# Altium PCB 5111HB015.pcbdoc (part 2 of 2)
Units mm, origin at the board's own origin, x right, y up, seen from the top; angles counter-clockwise.
Board outline 127.27 x 126.7 mm, 2 copper layers (Top Layer, Top, Bottom Layer, Bottom); 107 components, 65 nets, 610 pads, 396 vias.
Unrouted connection lines stored in the file: 97.
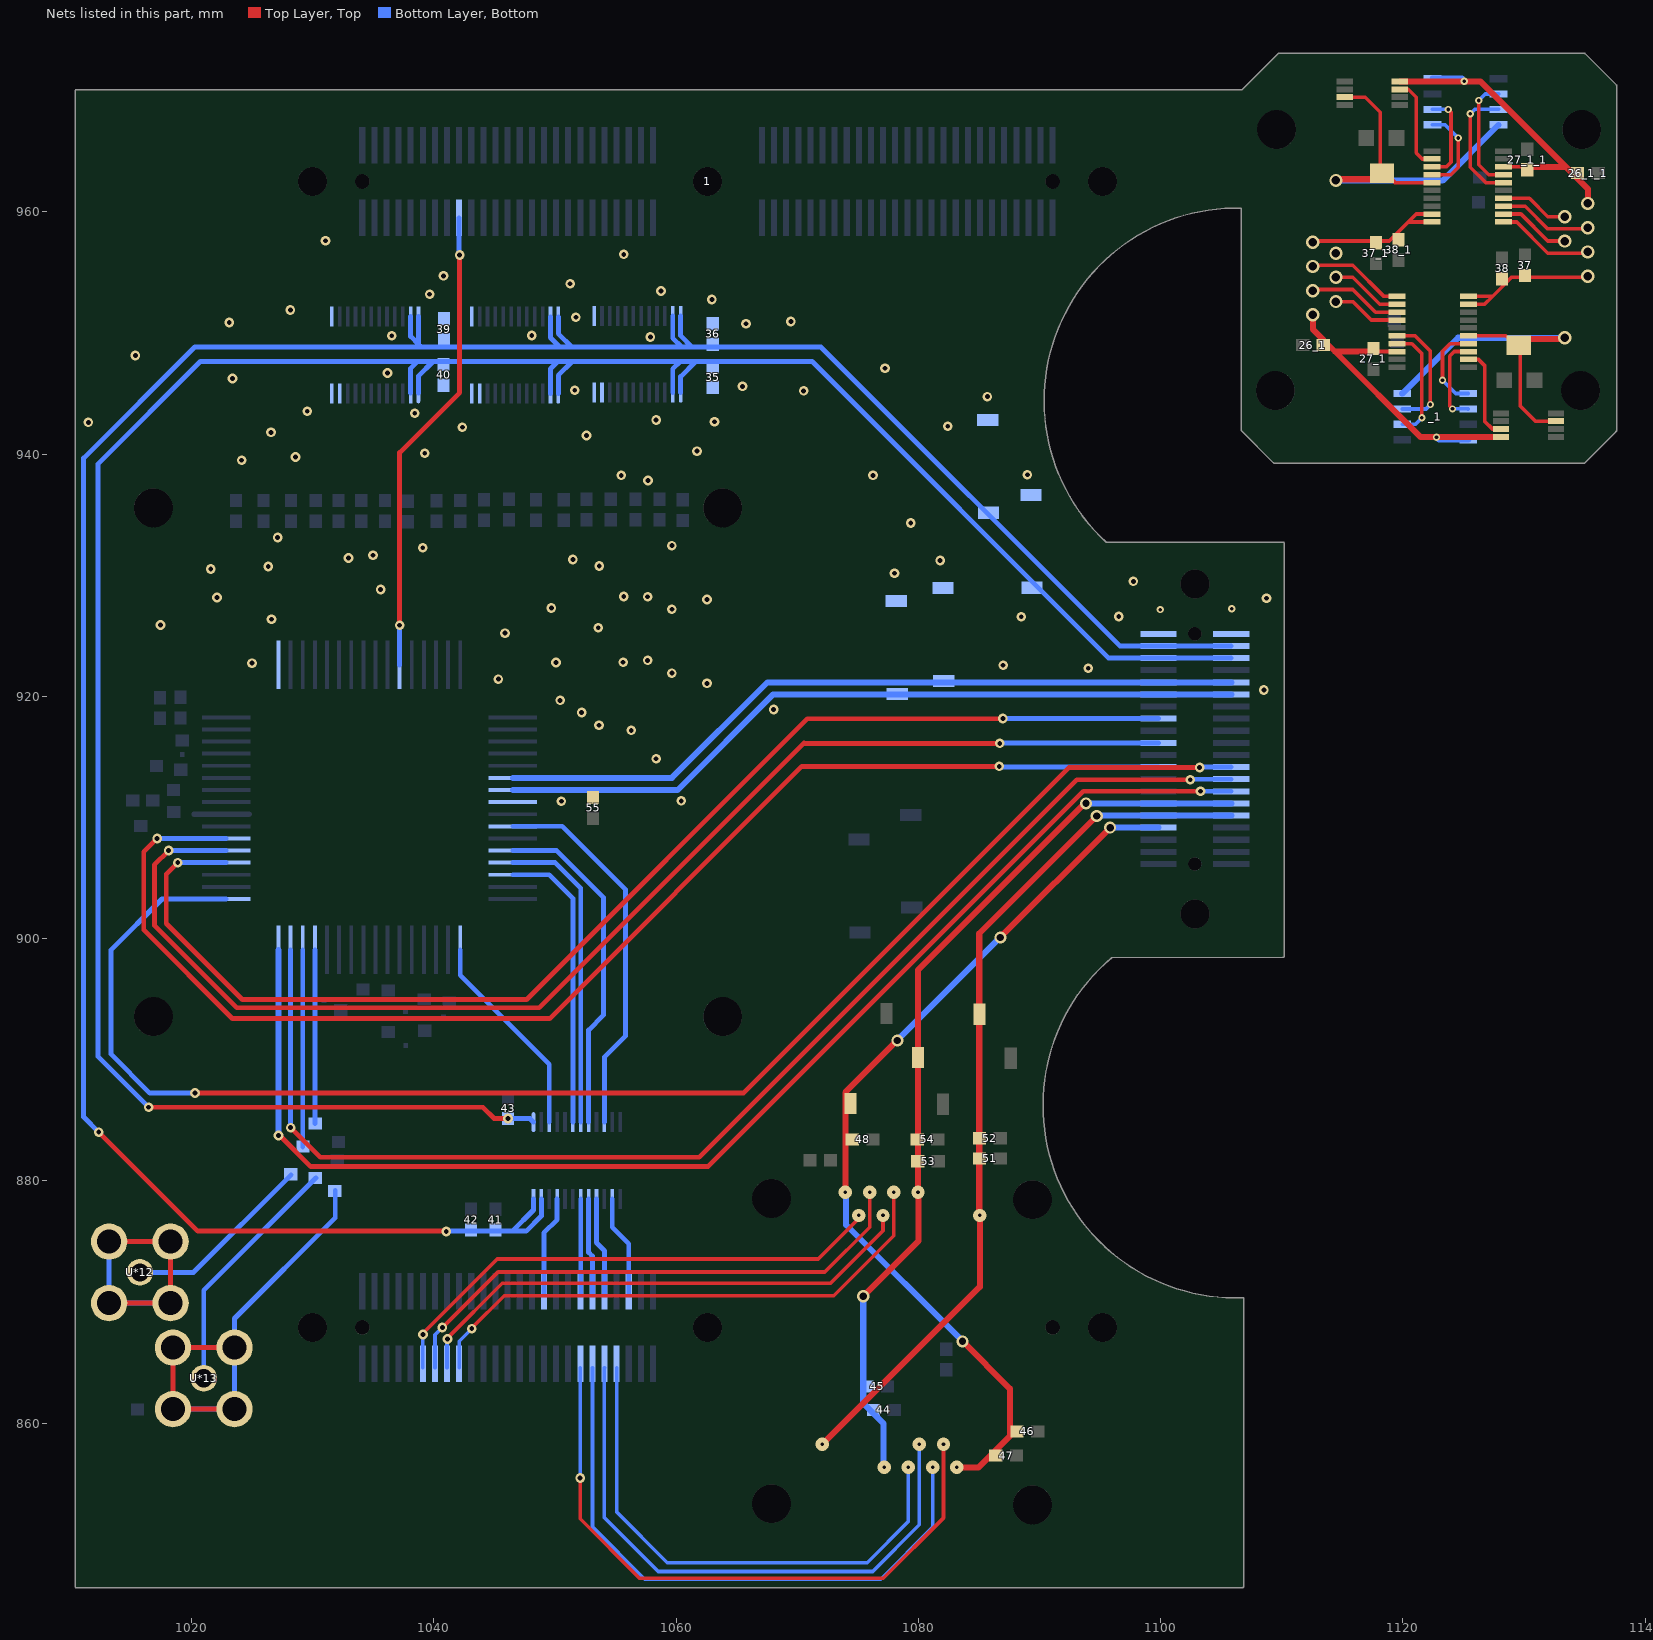
[diagram p2: the nets of this part, all layers, seen from the top]

## Via types
v1: diameter 0.8, hole 0.4, Top Layer, Top to Bottom Layer, Bottom, tented both sides, 300 vias
v2: diameter 1.1, hole 0.3, Top Layer, Top to Bottom Layer, Bottom, 30 vias
v3: diameter 1.1, hole 0.7, Top Layer, Top to Bottom Layer, Bottom, 30 vias
v4: diameter 0.6, hole 0.3, Top Layer, Top to Bottom Layer, Bottom, tented both sides, 14 vias
v5: diameter 1.2, hole 0.6, Top Layer, Top to Bottom Layer, Bottom, tented both sides, 9 vias
v6: diameter 1, hole 0.6, Top Layer, Top to Bottom Layer, Bottom, tented both sides, 7 vias
v7: diameter 0.9, hole 0.5, Top Layer, Top to Bottom Layer, Bottom, tented both sides, 6 vias

## Nets (pads, with @x,y where several pads share a name; then routed paths per layer and width w, separated by ;. In a path a pad name is that pad's centre, name@x,y a point inside that pad or via, vN(x,y) a via of type N, cw(c..) or ccw(c..) an arc to the next point about the centre after c; other vN are vias at no path point) (continued)
DAC_SCLK: ?.13@1119.525,951.725 ?.13@1128.325,960.475 ?.81 ?.94 | length 109.9
  Top Layer, Top w0.3: v1@1040.712,867.887 1045.3,872.475 1072.275,872.475 1075.975,876.175 v2(1075.975,879.05) ; v3@1112.775,953.6 1115.875,953.6 1117.75,951.725 ?.13@1119.525,951.725 ; ?.13@1128.325,960.475 1130.1,960.475 1131.975,958.6 v3@1135.075,958.6
  Bottom Layer, Bottom w0.3: ?.94@1040.087,864.573 ?.94@1040.087,864.898 1040.087,867.287 v1(1040.7,867.9) ; ?.81@1053.087,864.573 1053.1,864.56 1053.1,851.425 1057.405,847.12 1076.895,847.12 ; 1076.9,847.12 1076.895,847.12 ; v2(1081.175,856.35) 1081.175,851.4 1076.895,847.12
  other v3: 1112.575,953.5 1135.275,958.7
DAC_SDIN: ?.12@1119.525,952.375 ?.12@1128.325,959.825 ?.80 ?.93 | length 103.8
  Top Layer, Top w0.3: v1@1041.05,866.95 1045.65,871.55 1072.75,871.55 1077.075,875.875 v2(1077.075,877.15) ; v3(1114.475,954.6) 1115.875,954.6 1118.1,952.375 ?.12@1119.525,952.375 ; ?.12@1128.325,959.825 1129.75,959.825 1131.975,957.6 v3(1133.375,957.6)
  Bottom Layer, Bottom w0.3: ?.93@1041.087,864.573 ?.93@1041.087,864.898 1041.087,866.912 v1(1041.125,866.95) ; ?.80@1054.087,864.573 1054.075,864.561 1054.075,852.2 1058.525,847.75 1076.225,847.75 1080.075,851.6 v2(1080.075,858.25)
DAC_SDO: ?.11@1119.525,953.025 ?.11@1128.325,959.175 ?.79 ?.92 | length 104.3
  Top Layer, Top w0.3: v1@1043.1,867.825 1045.8,870.525 1073.025,870.525 1077.975,875.475 v2(1077.975,879.05) ; v3@1112.875,955.6 1115.875,955.6 1118.45,953.025 ?.11@1119.525,953.025 ; ?.11@1128.325,959.175 1129.4,959.175 1131.975,956.6 v3@1134.975,956.6
  Bottom Layer, Bottom w0.3: ?.92@1042.087,864.573 ?.92@1042.087,864.898 1042.087,866.762 v1(1043.125,867.8) ; ?.79@1055.087,864.573 1055.087,852.663 1059.275,848.475 1075.775,848.475 1079.175,851.875 v2(1079.175,856.35)
  other v3: 1112.575,955.5 1135.275,956.7
DAC_SYNC: ?.14@1119.525,951.075 ?.14@1128.325,961.125 ?.82 ?.95 | length 107
  Top Layer, Top w0.3: v1(1039.1,867.325) 1039.1,867.425 1045.225,873.55 1071.725,873.55 1075.075,876.9 v2(1075.075,877.15) ; v1(1052.075,855.475) 1052.075,852.1 1056.975,847.2 1077.1,847.2 1082.075,852.175 v2(1082.075,858.25) ; v3(1114.475,952.6) 1115.875,952.6 1117.4,951.075 ?.14@1119.525,951.075 ; ?.14@1128.325,961.125 1130.45,961.125 1131.975,959.6 v3(1133.375,959.6)
  Bottom Layer, Bottom w0.3: ?.95@1039.087,864.573 ?.95@1039.087,864.898 1039.087,867.312 v1(1039.1,867.325) ; v1(1052.075,855.475) 1052.087,855.487 ?.82@1052.087,864.573
DAC_VCC: 37.2 37_1.2 38.2 38_1.2 44.2 45.2 53.2 54.2 ?.2@1079.96,890.2 ?.6@1099.831,911.167 ?.9@1122.425,959.825 ?.9@1125.425,952.375 ?.10@1122.425,959.175 ?.10@1125.425,953.025 ?.35@1105.831,911.167 | length 100.9
  Top Layer, Top w0.3: v3@1112.675,957.6 1118.875,957.6 1120.475,959.2 ; ?.10@1122.425,959.175 1120.5,959.175 1120.475,959.2 ; ?.9@1122.425,959.825 1121.1,959.825 1120.475,959.2 ; ?.9@1125.425,952.375 1126.75,952.375 1127.375,953 ; ?.10@1125.425,953.025 1127.35,953.025 1127.375,953 ; v3@1135.175,954.6 1128.975,954.6 1127.375,953
  Top Layer, Top w0.5: v6@1075.563,870.363 1075.563,870.588 1080.025,875.05 1080.025,879 v2(1079.975,879.05) 1079.975,897.425 1093.725,911.175 v6(1093.85,911.175)
  Bottom Layer, Bottom w0.5: v6(1075.45,870.475) 1075.45,861.625 1077.125,859.95 1077.125,856.4 v2(1077.175,856.35) v2@1077,856.175 ; v6@1093.775,911.167 ?.6@1099.831,911.167 ?.35@1105.831,911.167
  other v3: 1135.275,954.7 1112.575,957.5
DAC_VDD: 51.2 52.2 ?.1@1085.05,893.754 ?.1@1118.275,963.2 ?.1@1129.575,949 ?.5@1099.831,910.167 ?.5@1122.425,962.425 ?.5@1125.425,949.775 ?.7@1115.2,969.475 ?.7@1132.65,942.725 ?.8@1127.9,967.195 ?.36@1105.831,910.167 _1.8 | length 134.9
  Top Layer, Top w0.3: ?.7@1115.2,969.475 1116.9,969.475 1118.145,968.23 ?.1@1118.145,963.33 ; ?.1@1118.575,963.2 1119.35,962.425 ?.5@1122.425,962.425 ; ?.5@1125.425,949.775 1128.5,949.775 ?.1@1129.275,949 ; ?.1@1129.705,948.87 1129.705,943.97 1130.95,942.725 ?.7@1132.65,942.725
  Top Layer, Top w0.5: v2(1072.075,858.25) 1085.075,871.25 v2(1085.075,877.15) 1085.025,877.2 1085.025,893.754 1085.025,900.425 v6(1094.725,910.125) ; v3@1114.475,962.7 ?.1@1117.775,962.7 ; ?.1@1130.075,949.5 v3@1133.375,949.5
  Bottom Layer, Bottom w0.5: v6@1094.6,910.167 ?.5@1099.831,910.167 ?.36@1105.831,910.167 ; v3(1114.475,962.6) 1122.75,962.6 ; _1.8@1119.95,945.005 1124.559,949.614 1125.1,949.614 ; 1122.75,962.586 1123.291,962.586 ?.8@1127.9,967.195 ; 1125.1,949.6 v3(1133.375,949.6)
DAC_VOUT: ?.2@1122.425,964.375 ?.2@1125.425,947.825 ?.3@1119.75,970.125 ?.3@1128.1,942.075 | length 15.5
  Top Layer, Top w0.3: ?.3@1119.75,970.125 1120.45,970.125 1121.1,969.475 1121.1,964.875 1121.6,964.375 ?.2@1122.425,964.375 ; ?.2@1125.425,947.825 1126.25,947.825 1126.75,947.325 1126.75,942.725 1127.4,942.075 ?.3@1128.1,942.075
DAC_VREFNF: ?.7@1127.9,968.465 ?.16@1119.525,949.775 ?.16@1128.325,962.425 _1.7 | length 20.3
  Top Layer, Top w0.3: ?.16@1119.525,949.775 1121,949.775 1122.275,948.5 v4(1122.275,944.1) ; v4(1125.575,968.1) 1125.575,963.7 1126.85,962.425 ?.16@1128.325,962.425
  Bottom Layer, Bottom w0.3: _1.7@1119.95,943.735 1121.91,943.735 v4(1122.275,944.1) ; v4(1125.575,968.1) 1125.94,968.465 ?.7@1127.9,968.465
DAC_VREFNS: ?.6@1127.9,969.735 ?.17@1119.525,949.125 ?.17@1128.325,963.075 _1.6 | length 19.1
  Top Layer, Top w0.3: ?.17@1119.525,949.125 1120.75,949.125 1121.575,948.3 v4(1121.575,943) ; v4(1126.275,969.2) 1126.275,963.9 1127.1,963.075 ?.17@1128.325,963.075
  Bottom Layer, Bottom w0.3: _1.6@1119.95,942.465 1121.04,942.465 v4(1121.575,943) ; v4(1126.275,969.2) 1126.81,969.735 ?.6@1127.9,969.735
DAC_VREFPF: ?.1@1122.45,967.195 ?.4@1122.425,963.075 ?.4@1125.425,949.125 _1.1 | length 14.8
  Top Layer, Top w0.3: ?.4@1122.425,963.075 1123.95,963.075 1124.575,963.7 v4(1124.575,966.1) ; v4(1123.275,946.1) 1123.275,948.5 1123.9,949.125 ?.4@1125.425,949.125
  Bottom Layer, Bottom w0.3: ?.1@1122.45,967.195 1123.48,967.195 v4(1124.575,966.1) ; v4(1123.275,946.1) 1124.37,945.005 _1.1@1125.4,945.005
DAC_VREPS: ?.2@1122.45,968.465 ?.3@1122.425,963.725 ?.3@1125.425,948.475 _1.2 | length 14.9
  Top Layer, Top w0.3: ?.3@1122.425,963.725 1123.6,963.725 1123.975,964.1 1123.975,968.236 v4(1123.75,968.461) ; v4(1124.1,943.739) 1123.875,943.964 1123.875,948.1 1124.25,948.475 ?.3@1125.425,948.475
  Bottom Layer, Bottom w0.3: ?.2@1122.45,968.465 1123.724,968.461 v4(1123.75,968.461) ; v4(1124.1,943.739) 1125.374,943.735 _1.2@1125.4,943.735
DAC_VSS: 26_1.1 26_1_1.1 27_1.1 27_1_1.1 46.1 47.1 48.1 ?.2@1074.385,886.4 ?.4@1099.831,909.167 ?.4@1119.75,970.775 ?.4@1122.45,971.005 ?.4@1128.1,941.425 ?.18@1119.525,948.475 ?.18@1128.325,963.725 _1.4 | length 130.8
  Top Layer, Top w0.3: 27_1.1@1117.775,948.475 ?.18@1119.525,948.475 ; ?.18@1128.325,963.725 27_1_1.1@1130.075,963.725
  Top Layer, Top w0.5: v2(1073.975,879.05) 1073.975,887.309 v6(1078.266,891.6) ; v2(1083.175,856.35) 1084.975,856.35 1087.55,858.925 1087.55,862.85 v6(1083.65,866.75) ; v6(1086.771,900.105) v6(1095.833,909.167) ; v3(1112.575,951.5) 1112.575,950.3 1114.4,948.475 ; 27_1.1@1117.775,948.475 1114.4,948.475 ; ?.4@1119.75,970.775 1126.4,970.775 1133.45,963.725 ; ?.4@1128.1,941.425 1121.45,941.425 1114.4,948.475 ; 27_1_1.1@1130.075,963.725 1133.45,963.725 ; v3(1135.275,960.7) 1135.275,961.9 1133.45,963.725
  Bottom Layer, Bottom w0.3: v4(1122.775,941.4) v4@1122.98,941.195 ; v4@1124.87,971.005 v4(1125.075,970.8)
  Bottom Layer, Bottom w0.5: v2(1073.975,879.05) 1074.025,879 1074.025,876.375 v6(1083.65,866.75) ; v6(1078.266,891.6) v6(1086.771,900.105) ; v6(1095.833,909.167) ?.4@1099.831,909.167 ; ?.4@1122.45,971.005 v4@1124.87,971.005 ; v4@1122.98,941.195 _1.4@1125.4,941.195
DGND: 35.1 36.2 39.2 40.1 55.2 ?.1@1078.175,927.875 ?.1@1082.025,928.95 ?.1@1085.723,942.825 ?.2@1089.3,936.64 ?.11@1032.225,945.025 ?.11@1043.775,945 ?.11@1053.875,945.075 ?.12@1031.575,945.025 ?.12@1043.125,945 ?.12@1053.225,945.075 ?.13@1031.575,951.375 ?.13@1043.125,951.35 ?.13@1053.225,951.425 ?.20@1099.831,925.167 ?.21@1105.831,925.167 ?.33@1046.525,911.275 ?.56
  other v1: 1050.525,911.35 1060.425,911.375 1058.35,914.85 1056.3,917.2 1053.625,917.625 1052.2,918.675 1068.05,918.925 1050.425,919.675 1108.525,920.525 1062.55,921.075 1045.325,921.425 1059.65,921.925 1094.025,922.325 1087,922.575 1024.975,922.75 1050.075,922.8 1055.625,922.825 1057.65,922.975 1045.875,925.225 1053.575,925.675 1017.425,925.9 1026.6,926.375 1088.5,926.575 1096.55,926.6 1059.65,927.2 1049.7,927.3 1062.55,928 1108.75,928.1 1022.1,928.175 1057.65,928.225 1055.675,928.25 1035.6,928.825 1097.75,929.5 1078.025,930.175 1021.575,930.525 1026.325,930.725 1053.65,930.775 1081.8,931.225 1051.475,931.3 1032.95,931.425 1034.975,931.65 1039.075,932.275 1059.65,932.45 1027.1,933.125 1079.375,934.325 1057.675,937.825 1055.475,938.25 1076.25,938.25 1089,938.3 1024.125,939.5 1028.575,939.775 1039.25,940.075 1061.725,940.25 1052.6,941.55 1026.55,941.8 1042.35,942.225 1082.425,942.3 1011.475,942.625 1063.175,942.675 1058.35,942.825 1038.425,943.375 1029.55,943.55 1085.7,944.75 1070.525,945.225 1051.625,945.275 1065.475,945.6 1023.375,946.25 1036.175,946.7 1077.25,947.1 1015.35,948.15 1057.875,949.675 1036.525,949.775 1048.075,949.8 1065.775,950.775 1023.1,950.875 1069.475,950.95 1051.725,951.3 1028.15,951.9 1062.95,952.775 1039.65,953.2 1058.75,953.475 1051.25,954.075 1040.8,954.725 1055.675,956.5 1031.05,957.625
  other v3: 1114.475,956.6
  other v4: 1099.98,927.167 1105.866,927.228
DLL_PG: 1.92 ?.46 | length 39
  Top Layer, Top w0.4: v1(1037.175,925.875) 1037.175,940.125 1042.125,945.075 v1(1042.125,956.45)
  Bottom Layer, Bottom w0.4: ?.46@1037.175,922.6 v1(1037.175,925.875) ; 1.92@1042.087,959.515 1042.087,956.488 v1(1042.125,956.45)
DVCC_2.5: ?.2@1082.1,921.285 ?.16@1099.831,921.167 ?.25@1105.831,921.167 ?.35@1046.525,913.275 | length 62.6
  Bottom Layer, Bottom w0.5: ?.35@1046.525,913.275 1059.65,913.275 1067.542,921.167 ?.16@1099.831,921.167 ?.25@1105.831,921.167
DVDD_1.2: ?.2@1078.25,920.21 ?.15@1099.831,920.167 ?.26@1105.831,920.167 ?.34@1046.525,912.275 | length 62.6
  Bottom Layer, Bottom w0.5: ?.34@1046.525,912.275 1060.125,912.275 1068.017,920.167 ?.15@1099.831,920.167 ?.26@1105.831,920.167
ENCAL: ?.7@1052.125,884.85 ?.17@1052.775,878.5 ?.20@1053.087,870.898 ?.28@1046.525,906.275 | length 33.9
  Bottom Layer, Bottom w0.4: ?.28@1046.525,906.275 1050.025,906.275 1052.125,904.175 ?.7@1052.125,884.85 ; ?.17@1052.775,878.5 1052.775,874.1 1053.087,873.788 ?.20@1053.087,870.898 ?.20@1053.087,870.573
ENCALG: ?.3@1049.525,884.85 ?.16@1049.087,870.898 ?.21@1050.175,878.5 ?.24@1042.175,899.075 | length 25.6
  Bottom Layer, Bottom w0.4: ?.24@1042.175,899.075 1042.175,896.975 1049.525,889.625 ?.3@1049.525,884.85 ; ?.16@1049.087,870.573 ?.16@1049.087,870.898 1049.087,875.712 1050.175,876.8 ?.21@1050.175,878.5
LATCHDEL: ?.6@1051.475,884.85 ?.18@1052.125,878.5 ?.19@1052.087,870.898 ?.27@1046.525,905.275 | length 32.2
  Bottom Layer, Bottom w0.4: ?.27@1046.525,905.275 1049.525,905.275 1051.475,903.325 ?.6@1051.475,884.85 ; ?.19@1052.087,870.573 1052.125,870.611 ?.18@1052.125,878.5
NENCMS: ?.8@1052.775,884.85 ?.16@1053.425,878.5 ?.21@1054.087,870.898 ?.29@1046.525,907.275 | length 36.4
  Bottom Layer, Bottom w0.4: ?.29@1046.525,907.275 1050.15,907.275 1054,903.425 1054,893.675 1052.775,892.45 ?.8@1052.775,884.85 ; ?.16@1053.425,878.5 1053.425,874.9 1054.087,874.238 ?.21@1054.087,870.898 ?.21@1054.087,870.573
RESET: ?.10@1054.075,884.85 ?.14@1054.725,878.5 ?.23@1056.087,870.898 ?.31@1046.525,909.275 | length 39.9
  Bottom Layer, Bottom w0.4: ?.31@1046.525,909.275 1050.6,909.275 1055.825,904.05 1055.825,891.975 1054.075,890.225 ?.10@1054.075,884.85 ; ?.14@1054.725,878.5 1054.725,876.175 1056.087,874.813 ?.23@1056.087,870.898 ?.23@1056.087,870.573
VCC_BUF_2.5V: 35.2 40.2 43.1 ?.1@1038.725,945.025 ?.1@1048.225,884.85 ?.1@1050.275,945 ?.1@1060.375,945.075 ?.1@1089.375,928.975 ?.2@1038.075,945.025 ?.2@1049.625,945 ?.2@1059.725,945.075 ?.18@1099.831,923.167 ?.23@1105.831,923.167 | length 212.3
  Top Layer, Top w0.4: v1(1016.45,886.075) 1044.05,886.075 1044.975,885.15 v1(1046.125,885.15)
  Bottom Layer, Bottom w0.4: v1(1016.45,886.075) 1012.275,890.25 1012.275,939.2 1020.725,947.65 1038.625,947.65 ; ?.2@1038.075,945.025 1038.075,947.1 1038.625,947.65 ; ?.1@1038.725,945.025 1038.725,946.45 1039.925,947.65 ; v1(1046.125,885.15) 1047.925,885.15 ?.1@1048.225,884.85 ; ?.2@1049.625,945 1049.625,947.05 1050.225,947.65 ; ?.1@1050.275,945 1050.275,946.5 1051.425,947.65 ; ?.2@1059.725,945.075 1059.725,947.05 1060.325,947.65 ; ?.1@1060.375,945.075 1060.375,946.4 1061.625,947.65 ; ?.23@1105.831,923.167 ?.18@1099.831,923.167 1095.708,923.167 1071.225,947.65 1061.625,947.65 ; 1038.625,947.65 1039.925,947.65 ; 1039.925,947.65 1050.225,947.65 ; 1050.225,947.65 1051.425,947.65 ; 1051.425,947.65 1060.325,947.65 ; 1060.325,947.65 1061.625,947.65
VCC_BUF_3.3V: 36.1 39.1 41.1 42.1 ?.2@1085.798,935.16 ?.19@1099.831,924.167 ?.22@1105.831,924.167 ?.23@1038.075,951.375 ?.23@1048.875,878.5 ?.23@1049.625,951.35 ?.23@1059.725,951.425 ?.24@1038.725,951.375 ?.24@1048.225,878.5 ?.24@1050.275,951.35 ?.24@1060.375,951.425 | length 226.9
  Top Layer, Top w0.4: v1@1012.375,883.975 1020.5,875.85 v1@1041.025,875.85
  Bottom Layer, Bottom w0.4: v1(1012.325,884.025) 1011.075,885.275 1011.075,939.675 1020.25,948.85 1038.95,948.85 ; ?.23@1038.075,951.375 1038.075,949.725 1038.725,949.075 ; ?.24@1038.725,951.375 1038.725,949.075 ; v1(1041.025,875.825) 1041.05,875.85 1046.475,875.85 ; ?.24@1048.225,878.5 1048.225,877.6 1046.475,875.85 ; ?.23@1048.875,878.5 1048.875,877.1 1047.625,875.85 1046.475,875.85 ; ?.23@1049.625,951.35 1049.625,949.625 1050.4,948.85 ; ?.24@1050.275,951.35 1050.275,949.95 1051.375,948.85 ; ?.23@1059.725,951.425 1059.725,949.575 1060.45,948.85 ; ?.24@1060.375,951.425 1060.375,949.775 1061.3,948.85 ; ?.22@1105.831,924.167 ?.19@1099.831,924.167 1096.633,924.167 1071.95,948.85 1061.3,948.85 ; 1038.725,949.075 1038.95,948.85 ; 1038.95,948.85 1050.4,948.85 ; 1050.4,948.85 1051.375,948.85 ; 1051.375,948.85 1060.45,948.85 ; 1060.45,948.85 1061.3,948.85
VCMI: ?.10@1028.175,899.075 ?.33@1105.831,913.167 | length 106.3
  Top Layer, Top w0.4: v1@1028.187,884.387 1030.625,881.95 1061.9,881.95 1093.075,913.125 v1(1102.45,913.125)
  Bottom Layer, Bottom w0.4: v1(1028.175,884.4) ?.10@1028.175,899.075 ; v1(1102.45,913.125) 1102.492,913.167 ?.33@1105.831,913.167
VCMO: ?.3@1022.85,908.275 ?.9@1099.831,914.167 | length 109.2
  Top Layer, Top w0.4: v1(1017.15,908.275) 1016.05,907.175 1016.05,900.725 1023.375,893.4 1049.55,893.4 1070.375,914.225 v1(1086.675,914.225)
  Bottom Layer, Bottom w0.4: v1(1017.15,908.275) ?.3@1022.85,908.275 ; v1(1086.675,914.225) 1086.733,914.167 ?.9@1099.831,914.167
VIN: ?.1@1030.2,880.225 ?.1@1030.2,884.75 ?.1@1031.825,879.175 ?.12@1030.175,899.075 U*13.1 U*13.2 U*13.3 U*13.4 U*13.5 | length 76.6
  Top Layer, Top w0.4: U*13.3@1023.54,861.16 U*13.2@1018.46,861.16 U*13.5@1018.46,866.24 U*13.4@1023.54,866.24
  Bottom Layer, Bottom w0.4: U*13.2@1018.46,861.16 U*13.3@1023.54,861.16 U*13.4@1023.54,866.24 1023.54,868.64 1031.85,876.95 ?.1@1031.85,879.225 ; U*13.1@1021,863.7 1021,870.975 ?.1@1030.263,880.238 ; ?.1@1030.175,884.725 ?.12@1030.175,899.075
VIP: ?.1@1028.175,880.55 ?.1@1029.2,882.825 ?.11@1029.175,899.075 U*12.1 U*12.2 U*12.3 U*12.4 U*12.5 | length 62.6
  Top Layer, Top w0.4: U*12.2@1013.185,869.91 U*12.3@1018.265,869.91 U*12.4@1018.265,874.99 U*12.5@1013.185,874.99
  Bottom Layer, Bottom w0.4: U*12.1@1015.725,872.45 1020.15,872.45 ?.1@1028.212,880.512 ; U*12.3@1018.265,869.91 U*12.2@1013.185,869.91 U*12.5@1013.185,874.99 U*12.4@1018.265,874.99 ; ?.1@1029.175,882.8 ?.11@1029.175,899.075
VREFNI: ?.8@1022.85,903.275 ?.32@1105.831,914.167 | length 124.8
  Top Layer, Top w0.4: v1(1020.275,887.25) 1065.55,887.25 1092.425,914.125 v1(1103.225,914.125)
  Bottom Layer, Bottom w0.4: v1(1020.275,887.25) 1016.55,887.25 1013.35,890.45 1013.35,899.075 1017.55,903.275 ?.8@1022.85,903.275 ; v1(1103.225,914.125) 1103.267,914.167 ?.32@1105.831,914.167
VREFNO: ?.5@1022.85,906.275 ?.13@1099.831,918.167 | length 103.6
  Top Layer, Top w0.4: v1(1018.85,906.275) 1017.9,905.325 1017.9,901.25 1024.175,894.975 1047.65,894.975 1070.825,918.15 v1@1086.975,918.15
  Bottom Layer, Bottom w0.4: v1(1018.85,906.275) ?.5@1022.85,906.275 ; v1(1086.975,918.175) 1099.823,918.175 ?.13@1099.831,918.167
VREFPI: ?.9@1027.175,899.075 ?.34@1105.831,912.167 | length 107.7
  Top Layer, Top w0.4: v1@1027.338,883.688 1029.85,881.175 1062.625,881.175 1093.625,912.175 v1(1103.3,912.175)
  Bottom Layer, Bottom w0.4: v1(1103.3,912.175) 1103.308,912.167 ?.34@1105.831,912.167
  Bottom Layer, Bottom w0.5: v1(1027.175,883.75) ?.9@1027.175,899.075
VREFPO: ?.4@1022.85,907.275 ?.11@1099.831,916.167 | length 106.2
  Top Layer, Top w0.4: v1(1018.1,907.275) 1016.925,906.1 1016.925,901.1 1023.725,894.3 1048.7,894.3 1070.55,916.15 1070.575,916.125 v1(1086.725,916.125)
  Bottom Layer, Bottom w0.4: v1(1018.1,907.275) ?.4@1022.85,907.275 ; v1(1086.725,916.125) 1086.767,916.167 ?.11@1099.831,916.167
pads on no net: 1.1 1.2 1.3 1.4 1.5 1.6 1.7 1.8 1.9 1.10 1.11 1.12 1.13 1.14 1.15 1.16 1.17 1.18 1.19 1.20 1.21 1.22 1.23 1.24 1.25 1.26 1.27 1.28 1.29 1.30 1.31 1.32 1.33 1.34 1.35 1.36 1.37 1.38 1.39 1.40 1.41 1.42 1.43 1.44 1.45 1.46 1.47 1.48 1.49 1.50 1.51 1.52 1.53 1.54 1.55 1.56 1.57 1.58 1.59 1.60 1.61 1.62 1.63 1.64 1.65 1.66 1.67 1.68 1.69 1.70 1.71 1.72 1.73 1.74 1.75 1.76 1.77 1.78 1.79 1.80 1.101 1.102 1.103 1.104 1.105 ?.1@1034.087,870.898 ?.1@1122.425,965.025 ?.1@1125.425,947.175 ?.2@1035.087,870.898 ?.3@1036.087,870.898 ?.3@1059.075,945.075 ?.4@1037.087,870.898 ?.4@1058.425,945.075 ?.5@1038.087,870.898 ?.5@1057.775,945.075 ?.5@1115.2,970.775 ?.5@1132.65,941.425 ?.6@1039.087,870.898 ?.6@1057.125,945.075 ?.7@1040.087,870.898 ?.7@1056.475,945.075 ?.7@1099.831,912.167 ?.8@1041.087,870.898 ?.9@1042.087,870.898 ?.10@1043.087,870.898 ?.11@1044.087,870.898 ?.12@1045.087,870.898 ?.13@1046.087,870.898 ?.14@1047.087,870.898 ?.15@1048.087,870.898 ?.17@1055.825,951.425 ?.17@1099.831,922.167 ?.18@1056.475,951.425 ?.19@1057.125,951.425 ?.20@1057.775,951.425 ?.20@1119.525,947.175 ?.20@1128.325,965.025 ?.21@1058.425,951.425 ?.24@1057.087,870.898 ?.24@1105.831,922.167 ?.25@1058.087,870.898 ?.29@1105.831,917.167 ?.30@1105.831,916.167 ?.31@1105.831,915.167 ?.37@1105.831,909.167 ?.41@1102.831,906.167 ?.42@1102.831,925.167 ?.43@1102.831,902.047 ?.44@1102.831,929.287 ?.83 ?.84 ?.85 ?.86 ?.87 ?.88 ?.96 ?.97 ?.98 ?.99 ?.100 ?.101 ?.102 ?.103 ?.104 ?.105

## Polygon pours and split planes (outlines as drawn)
DAC_DGND on Top Layer, Top "DAC_DGND" (solid, pour order 20): 1106.75,952.7 1112.95,952.7 1113.875,951.775 1114.55,951.775 1116.225,950.1 1132.745,950.1 1133.25,950.1 1133.539,950.389 1134.675,951.525 1136.175,951.525 1137.525,950.175 1137.525,959.85 1137.575,959.9 1137.558,959.917 1134.558,959.917 1133.875,960.6 1133.85,960.625 1132.775,960.625 1131.3,962.1 1115.105,962.1 1114.272,962.1 1114.07,961.898 1112.8,960.628 1112.8,960.575 1107.35,960.575 1106.775,960
DAC_AGND on Top Layer, Top "DAC_AGND" (solid, pour order 14): 1109.85,973.025 1109.85,972.95 1106.9,970 1106.875,969.975 1106.875,962.15 1106.875,961.2 1107.45,960.625 1107.5,960.575 1111.75,960.575 1112.8,960.575 1113.5,961.275 1114.325,962.1 1122.475,962.1 1131.3,962.1 1132.5,960.9 1132.775,960.625 1133.875,960.625 1133.875,960.6 1134.4,960.075 1134.575,959.9 1137.575,959.9 1137.575,970.375 1134.95,973 1134.95,973.025
DAC_AGND on Top Layer, Top "DAC_AGND" (solid, pour order 12): 1106.775,942.025 1109.375,939.425 1109.375,939.325 1134.975,939.325 1135,939.35 1137.525,941.875 1137.525,942 1137.525,950.175 1136.45,951.25 1136.175,951.525 1135.125,951.525 1134.675,951.525 1133.8,950.65 1133.25,950.1 1124.6,950.1 1116.225,950.1 1114.8,951.525 1114.55,951.775 1114.025,951.775 1113.875,951.775 1113.225,952.425 1112.95,952.7 1106.75,952.7
AGND on Top Layer, Top "AGND" (solid, pour order 6): 1010.375,927.875 1010.4,927.85 1010.4,846.525 1106.525,846.525 1106.6,846.6 1106.65,846.65 1106.65,870.15 1099.45,870.15 1092.675,876.925 1091.625,877.975 1091.625,879 1091.625,879.2 1090.625,880.2 1090.05,880.775 1090.05,884.2 1090.05,892.8 1095.75,898.5 1095.775,898.525 1110,898.525 1110,919 1109.5,919.5 1069.85,919.5 1061.186,910.836 1044.334,910.836 1044.334,902.109 1043.575,901.35 1043.525,901.4 1025.6,901.4 1025.5,901.4 1025.125,901.775 1025.126,920.439 1025.086,920.439 1021.825,923.7 1014.55,923.7
DGND on Top Layer, Top "DGND" (solid, pour order 0): 1110.1,922.175 1110.075,922.2 1110.075,932.65 1095.425,932.65 1090.25,937.825 1090.25,946.025 1090.25,951 1096.9,957.65 1099.65,960.4 1105.85,960.4 1105.85,970 1010.475,970 1010.475,927.9 1013.475,924.9 1014.65,923.725 1019.175,923.725 1021.925,923.725 1025.45,920.2 1025.475,920.225 1044.175,920.225 1044.175,910.837 1044.187,910.825 1046.65,910.825 1061.25,910.825 1062.825,912.4 1069.362,919.187 1069.725,919.55 1073.875,919.55 1109.875,919.55 1110.1,919.55
DAC_DGND on Bottom Layer, Bottom "DAC_DGND" (solid, pour order 22): 1106.75,952.7 1112.95,952.7 1113.875,951.775 1114.55,951.775 1116.225,950.1 1132.745,950.1 1133.25,950.1 1133.539,950.389 1134.675,951.525 1136.175,951.525 1137.525,950.175 1137.525,959.85 1137.575,959.9 1137.558,959.917 1134.558,959.917 1133.875,960.6 1133.85,960.625 1132.775,960.625 1131.3,962.1 1115.105,962.1 1114.272,962.1 1114.07,961.898 1112.8,960.628 1112.8,960.575 1107.35,960.575 1106.775,960
DAC_AGND on Bottom Layer, Bottom "DAC_AGND" (solid, pour order 18): 1106.775,942.025 1109.375,939.425 1109.375,939.325 1134.975,939.325 1135,939.35 1137.525,941.875 1137.525,942 1137.525,950.175 1136.45,951.25 1136.175,951.525 1135.125,951.525 1134.675,951.525 1133.8,950.65 1133.25,950.1 1124.6,950.1 1116.225,950.1 1114.8,951.525 1114.55,951.775 1114.025,951.775 1113.875,951.775 1113.225,952.425 1112.95,952.7 1106.75,952.7
DAC_AGND on Bottom Layer, Bottom "DAC_AGND" (solid, pour order 16): 1109.85,973.025 1109.85,972.95 1106.9,970 1106.875,969.975 1106.875,962.15 1106.875,961.2 1107.45,960.625 1107.5,960.575 1111.75,960.575 1112.8,960.575 1113.5,961.275 1114.325,962.1 1122.475,962.1 1131.3,962.1 1132.5,960.9 1132.775,960.625 1133.875,960.625 1133.875,960.6 1134.4,960.075 1134.575,959.9 1137.575,959.9 1137.575,970.375 1134.95,973 1134.95,973.025
AGND on Bottom Layer, Bottom "AGND" (solid, pour order 4): 1010.475,927.9 1010.5,927.875 1010.5,846.55 1106.625,846.55 1106.7,846.625 1106.75,846.675 1106.75,870.175 1099.55,870.175 1092.775,876.95 1091.725,878 1091.725,879.025 1091.725,879.225 1090.725,880.225 1090.15,880.8 1090.15,884.225 1090.15,892.825 1095.85,898.525 1095.875,898.55 1110.1,898.55 1110.1,919.025 1109.85,919.275 1069.7,919.275 1061.286,910.861 1044.434,910.861 1044.434,902.134 1043.675,901.375 1043.625,901.425 1025.7,901.425 1025.6,901.425 1025.225,901.8 1025.226,920.464 1025.186,920.464 1021.925,923.725 1014.65,923.725
DGND on Bottom Layer, Bottom "DGND" (solid, pour order 2): 1110.1,922.175 1110.075,922.2 1110.075,932.65 1095.425,932.65 1090.25,937.825 1090.25,946.025 1090.25,951 1096.9,957.65 1099.65,960.4 1105.85,960.4 1105.85,970 1010.475,970 1010.475,927.9 1013.475,924.9 1014.65,923.725 1019.175,923.725 1021.925,923.725 1025.45,920.2 1025.475,920.225 1044.175,920.225 1044.175,910.837 1044.187,910.825 1046.65,910.825 1061.25,910.825 1062.825,912.4 1069.75,919.55 1110.1,919.55

## Other copper
Top Layer, Top:
  pour cut-out: 1101.062,927.475 1101.524,927.142 1101.682,927.051 1102.116,926.865 1102.675,926.777 1103.455,926.847 1104.09,927.125 1104.587,927.524 1104.879,927.867 1105.111,928.266 1105.255,928.74 1105.32,929.208 1105.301,929.645 1105.199,930.076 1105.018,930.494 1104.726,930.921 1104.373,931.25 1104.179,931.394 1103.965,931.524 1103.645,931.649 1103.418,931.719 1103.116,931.784 1102.787,931.797 1102.341,931.756 1101.979,931.658 1101.608,931.491 1101.186,931.217 1100.866,930.874 1100.592,930.457 1100.471,930.173 1100.378,929.867 1100.318,929.519 1100.313,929.204 1100.374,928.675 1100.559,928.174 1100.801,927.798
  pour cut-out: 1101.028,900.231 1101.49,899.898 1101.648,899.807 1102.082,899.621 1102.641,899.533 1103.421,899.603 1104.056,899.881 1104.553,900.28 1104.845,900.623 1105.077,901.022 1105.221,901.496 1105.286,901.964 1105.267,902.401 1105.165,902.832 1104.984,903.25 1104.692,903.677 1104.339,904.006 1104.145,904.15 1103.931,904.28 1103.611,904.405 1103.384,904.475 1103.082,904.54 1102.753,904.553 1102.307,904.512 1101.945,904.414 1101.574,904.247 1101.152,903.973 1100.832,903.63 1100.558,903.213 1100.437,902.929 1100.344,902.623 1100.284,902.275 1100.279,901.96 1100.34,901.431 1100.525,900.93 1100.767,900.554
  pour cut-out: 1093.442,960.703 1093.904,960.37 1094.062,960.279 1094.496,960.093 1095.055,960.005 1095.835,960.075 1096.47,960.353 1096.967,960.752 1097.259,961.095 1097.491,961.494 1097.635,961.968 1097.7,962.436 1097.681,962.873 1097.579,963.304 1097.398,963.722 1097.106,964.149 1096.753,964.478 1096.559,964.622 1096.345,964.752 1096.025,964.877 1095.798,964.947 1095.496,965.012 1095.167,965.025 1094.721,964.984 1094.359,964.886 1093.988,964.719 1093.566,964.445 1093.246,964.102 1092.972,963.685 1092.851,963.401 1092.758,963.095 1092.698,962.747 1092.693,962.432 1092.754,961.903 1092.939,961.402 1093.181,961.026
  pour cut-out: 1028.216,960.701 1028.678,960.368 1028.836,960.277 1029.27,960.091 1029.829,960.003 1030.609,960.073 1031.244,960.351 1031.741,960.75 1032.033,961.093 1032.265,961.492 1032.409,961.966 1032.474,962.434 1032.455,962.871 1032.353,963.302 1032.172,963.72 1031.88,964.147 1031.527,964.476 1031.333,964.62 1031.119,964.75 1030.799,964.875 1030.572,964.945 1030.27,965.01 1029.941,965.023 1029.495,964.982 1029.133,964.884 1028.762,964.717 1028.34,964.443 1028.02,964.1 1027.746,963.683 1027.625,963.399 1027.532,963.093 1027.472,962.745 1027.467,962.43 1027.528,961.901 1027.713,961.4 1027.955,961.024
  pour cut-out: 1019.802,932.49 1020.58,933.48 1021.075,934.541 1021.216,935.672 1021.146,936.238 1021.004,936.733 1020.863,937.228 1020.58,937.794 1019.873,938.642 1018.954,939.349 1017.928,939.879 1016.868,939.879 1015.807,939.809 1015.277,939.632 1014.711,939.349 1014.216,938.996 1013.756,938.607 1013.368,938.147 1013.049,937.687 1012.766,937.192 1012.59,936.662 1012.484,935.637 1012.554,934.576 1013.049,933.516 1013.721,932.49 1014.711,931.783 1015.807,931.323 1016.903,931.217 1017.928,931.394 1018.918,931.818
  pour cut-out: 1060.823,960.718 1061.285,960.385 1061.443,960.294 1061.877,960.108 1062.436,960.02 1063.216,960.09 1063.851,960.368 1064.348,960.767 1064.64,961.11 1064.872,961.509 1065.016,961.983 1065.081,962.451 1065.062,962.888 1064.96,963.319 1064.779,963.737 1064.487,964.164 1064.134,964.493 1063.94,964.637 1063.726,964.767 1063.406,964.892 1063.179,964.962 1062.877,965.027 1062.548,965.04 1062.102,964.999 1061.74,964.901 1061.369,964.734 1060.947,964.46 1060.627,964.117 1060.353,963.7 1060.232,963.416 1060.139,963.11 1060.079,962.762 1060.074,962.447 1060.135,961.918 1060.32,961.417 1060.562,961.041
  pour cut-out: 1069.249,932.563 1070.027,933.553 1070.522,934.614 1070.663,935.745 1070.593,936.311 1070.451,936.806 1070.31,937.301 1070.027,937.866 1069.32,938.715 1068.401,939.422 1067.375,939.952 1066.315,939.952 1065.254,939.881 1064.724,939.705 1064.158,939.422 1063.663,939.068 1063.203,938.679 1062.814,938.22 1062.496,937.76 1062.213,937.265 1062.037,936.735 1061.931,935.71 1062.001,934.649 1062.496,933.588 1063.168,932.563 1064.158,931.856 1065.254,931.396 1066.35,931.29 1067.375,931.467 1068.365,931.891
  text "5111HB015" at 1069.544,965.158 h3.53
  text "10.2020" at 1069.544,961.299 h3.53
Bottom Layer, Bottom:
  pour cut-out: 1033.709,866.205 1058.402,866.196 1058.402,868.999 1033.713,868.999
  pour cut-out: 1033.675,961.163 1058.368,961.154 1058.368,963.957 1033.679,963.957
  pour cut-out: 1066.776,961.163 1091.469,961.154 1091.469,963.957 1066.78,963.957
  pour cut-out: 1066.851,890.491 1067.628,891.481 1068.123,892.541 1068.265,893.673 1068.194,894.239 1068.053,894.733 1067.911,895.228 1067.628,895.794 1066.921,896.643 1066.002,897.35 1064.977,897.88 1063.916,897.88 1062.855,897.809 1062.325,897.633 1061.759,897.35 1061.264,896.996 1060.805,896.607 1060.416,896.148 1060.098,895.688 1059.815,895.193 1059.638,894.663 1059.532,893.637 1059.603,892.577 1060.098,891.516 1060.847,890.385 1061.759,889.784 1062.855,889.324 1063.951,889.218 1064.977,889.395 1065.967,889.819
  pour cut-out: 1019.765,932.516 1020.542,933.506 1021.037,934.566 1021.179,935.698 1021.108,936.264 1020.967,936.758 1020.825,937.253 1020.542,937.819 1019.835,938.668 1018.916,939.375 1017.891,939.905 1016.83,939.905 1015.769,939.834 1015.239,939.658 1014.673,939.375 1014.178,939.021 1013.719,938.632 1013.33,938.173 1013.012,937.713 1012.729,937.218 1012.552,936.688 1012.446,935.662 1012.517,934.602 1013.012,933.541 1013.761,932.41 1014.673,931.809 1015.769,931.349 1016.865,931.243 1017.891,931.42 1018.881,931.844
  pour cut-out: 1104.182,902.956 1104.191,927.649 1101.388,927.649 1101.388,902.96
  pour cut-out: 1069.249,932.563 1070.027,933.553 1070.522,934.614 1070.663,935.745 1070.593,936.311 1070.451,936.806 1070.31,937.301 1070.027,937.866 1069.32,938.715 1068.401,939.422 1067.375,939.952 1066.315,939.952 1065.254,939.881 1064.724,939.705 1064.158,939.422 1063.663,939.068 1063.203,938.679 1062.814,938.22 1062.496,937.76 1062.213,937.265 1062.037,936.735 1061.931,935.71 1062.001,934.649 1062.496,933.588 1063.246,932.457 1064.158,931.856 1065.254,931.396 1066.35,931.29 1067.375,931.467 1068.365,931.891

## Silkscreen, mask and mechanical layers (free items; w line width, h text height)
Top Overlay, Top Silk:
  lines w0.05: 1016.798,893.463 1063.975,935.588 ; 1016.842,935.588 1064.263,893.105
  lines w0.15: 1011.064,914.578 1071.68,914.463
  lines w0.2: 1022.197,963.431 1061.283,963.431 ; 1023.506,969.026 1062.592,969.026 ; 1023.721,878.054 1062.807,878.054 ; 1023.951,876.83 1063.037,876.83 ; 1012.842,890.066 1067.842,890.066 1067.842,939.066 1012.842,939.066 1012.842,890.066
  lines w0.3: 1072.3,879.525 1072.375,879.525 1073.05,880.2 1078.65,880.2 1079.025,879.825 1079.025,878.65 1080.325,877.35 1080.325,876.8 1079.525,876 1072.3,876 1071.5,876.8 1071.5,878.675 1072.5,879.675 1072.525,879.675 ; 1068.725,856.6 1068.725,858.25 1069.775,859.3 1078.7,859.3 1079.025,858.975 1079.025,857.85 1078.275,857.1 1078.275,855.65 1077.975,855.35 1069.975,855.35 1068.725,856.6
  text "DIO1_24" at 1034.587,967.376 h0.67 r90
  text "--------------------------" at 1034.673,967.376 h0.67
  text "DIO1_0" at 1058.62,967.376 h0.67 r90
  text "DIO4_0" at 1067.337,967.376 h0.67 r90
  text "--------------------------" at 1067.384,967.376 h0.67
  text "DIO4_24" at 1091.416,967.376 h0.67 r90
  text "DIO1_25" at 1034.765,953.266 h0.67 r90
  text "DIO1_39" at 1048.675,953.266 h0.67 r90
  text "DIO0_0" at 1049.849,953.266 h0.67 r90
  text "DIO0_7" at 1056.795,953.266 h0.67 r90
  text "A2" at 1067.947,953.266 h0.67 r90
  text "DIO3_7" at 1069.807,953.266 h0.67 r90
  text "------" at 1069.925,953.266 h0.67
  text "DIO3_0" at 1076.681,953.266 h0.67 r90
  text "DIO4_39" at 1077.905,953.266 h0.67 r90
  text "--------------" at 1077.965,953.266 h0.67
  text "DIO4_25" at 1091.548,953.266 h0.67 r90
  text "GND" at 1110.489,924.914 h0.52
  text "GND" at 1115.139,924.866 h0.52
  text "VCC1" at 1110.439,923.898 h0.52
  text "VCC1" at 1115.089,923.85 h0.52
  text "VCC2" at 1110.439,922.881 h0.52
  text "VCC2" at 1115.089,922.833 h0.52
  text "VCC3" at 1110.339,921.914 h0.52
  text "VCC6" at 1114.989,921.866 h0.52
  text "VCC4" at 1110.389,920.947 h0.52
  text "VCC4" at 1115.039,920.899 h0.52
  text "VCC5" at 1110.364,920.006 h0.52
  text "VCC5" at 1115.014,919.958 h0.52
  text "AI3-" at 1110.439,918.989 h0.52
  text "AO0" at 1115.089,918.941 h0.52
  text "AI3+" at 1110.414,917.997 h0.52
  text "AO1" at 1115.064,917.949 h0.52
  text "AI2-" at 1110.564,917.03 h0.52
  text "AO2" at 1115.214,916.982 h0.52
  text "AI2+" at 1110.464,916.039 h0.52
  text "AO3" at 1115.114,915.991 h0.52
  text "AI1-" at 1110.489,914.997 h0.52
  text "AO4" at 1115.139,914.949 h0.52
  text "AI1+" at 1110.489,913.98 h0.52
  text "AO5" at 1115.139,913.932 h0.52
  text "AI0-" at 1110.414,912.988 h0.52
  text "AO6" at 1115.064,912.94 h0.52
  text "AI0+" at 1110.489,911.972 h0.52
  text "AO7" at 1115.139,911.924 h0.52
  text "VCC11" at 1110.439,911.005 h0.52
  text "VCC11" at 1115.089,910.957 h0.52
  text "VCC10" at 1110.389,909.988 h0.52
  text "VCC10" at 1115.039,909.94 h0.52
  text "VCC9" at 1110.464,909.046 h0.52
  text "VCC12" at 1115.114,908.998 h0.52
  text "VCC8" at 1110.414,908.03 h0.52
  text "VCC8" at 1115.064,907.982 h0.52
  text "VCC7" at 1110.414,906.963 h0.52
  text "VCC7" at 1115.064,906.915 h0.52
  text "GND" at 1110.539,905.971 h0.52
  text "GND" at 1115.189,905.923 h0.52
  text "DIO2_14" at 1034.763,872.397 h0.67 r90
  text "--------------" at 1034.766,872.397 h0.67
  text "DIO0_15" at 1049.847,872.397 h0.67 r90
  text "------" at 1050.207,872.397 h0.67
Mechanical 1, Board:
  lines w0.2: 1010.492,970 1010.494,846.496 1106.763,846.515 1106.774,870.241 ; 1010.503,970 1106.774,970 ; 1095.459,932.642 cw(c1106.289,944.419) 1106.764,960.412 ; 1095.574,932.641 1110.1,932.642 1110.1,898.549 1095.974,898.541 ; 1095.906,898.5 ccw(c1106.19,886.244) 1106.777,870.254 ; 1106.775,941.975 1109.4,939.35 1134.95,939.35 1137.509,941.909 ; 1106.775,942.025 1106.775,960.412 ; 1106.8,970.025 1109.759,972.984 ; 1109.775,973 1134.975,973 1137.559,970.416 1137.559,941.959
  lines w0.3: 1025.35,901.45 1025.35,920.225 1044.175,920.225 1044.175,901.45 1025.35,901.45

## Text inside footprints (layer, text, board x,y; h text height)
?: Top Overlay, Top Silk "A3" at 1058.432,872.722 h0.67 r90; Top Overlay, Top Silk "DIO2_15" at 1034.587,860.381 h0.67 r90; Top Overlay, Top Silk "DIO2_0" at 1048.673,872.722 h0.67 r90; Top Overlay, Top Silk "DIO2_39" at 1058.62,860.381 h0.67 r90; Top Overlay, Top Silk "DIO0_8" at 1056.793,872.722 h0.67 r90; Top Overlay, Top Silk "------" at 1050.207,872.722 h0.67; Top Overlay, Top Silk "--------------------------" at 1034.673,860.381 h0.67